# EAGLE board emonTx4-CTExt (EAGLE 9.6.2)
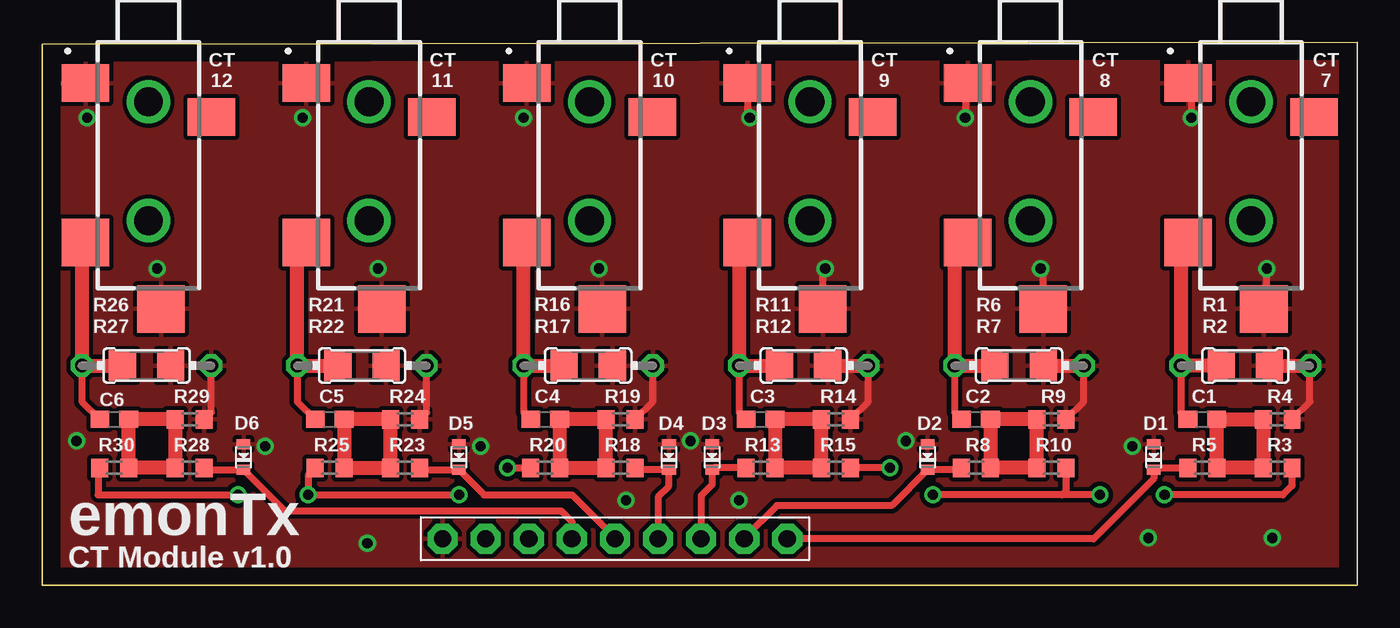
[diagram p0: board, top side]
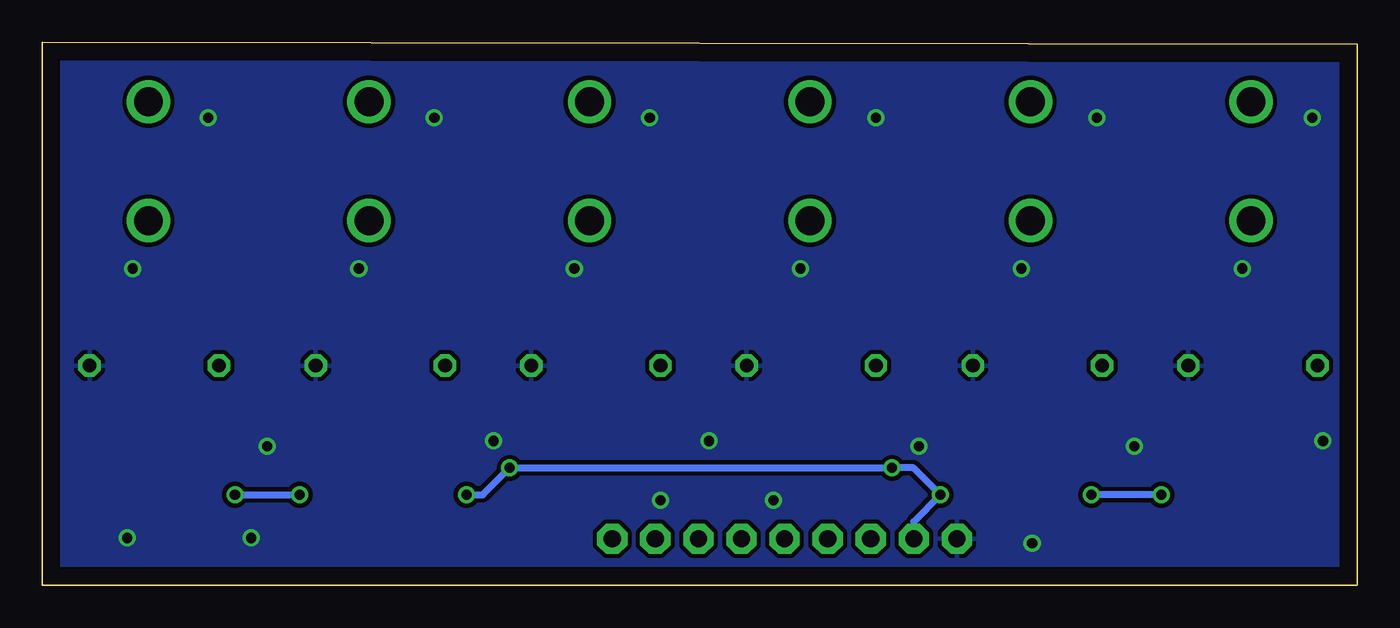
[diagram p1: board, bottom side, seen from below]

Size 77.5 x 32 mm. Coordinates in mm from the lower left corner, seen from the top.
Outline: 0,31.91 0,0 77.5,0 77.5,32 0,31.91
Copper layers (1*16): Top 0.035mm / dielectric 1.5mm / Bottom 0.035mm
Design rules "default *": minimum track width 6mil, minimum drill 0.35mm, track to track 6mil, track to pad 6mil, pad to pad 6mil, via to via 6mil, smd to smd 6mil, copper to edge 40mil, drill to drill 6mil, minimum pad ring 10mil, minimum via ring 8mil, stop-mask expansion 4mil, vias tented up to drill 0.6mm, thermal gap 10mil
Net classes: 0 default: width 0.203 mm, drill 0.6 mm, clearance 0.203 mm; 1 power: width 0.305 mm, drill 0.6 mm, clearance 0.254 mm; 2 gnd: width 0.254 mm, drill 0.6 mm, clearance 0.254 mm

## Footprints (pad centres in the part's own frame; a part is rotated, then mirrored left to right if it is on the bottom)
1X09-BIG = drill 1.016 pad 1.778 octagon: 1 -10.16,0; 2 -7.62,0; 3 -5.08,0; 4 -2.54,0; 5 0,0; 6 2.54,0; 7 5.08,0; 8 7.62,0; 9 10.16,0
C0603 = smd 1.1 x 1: 1 -0.85,0; 2 0.85,0
SOD-523 = smd 0.8 x 0.6: A 0,-0.75; K 0,0.75
SJ-3524-SMT-TR = smd 2.2 x 2.8: 1 2.4,-6.7; 3 4.4,0.7 | smd 2.8 x 2.8: 2 11.8,-6.7; 4 15.7,-2.25 | drill 1.7 pad 2.55: 5 3.5,-3; 6 10.5,-3
R1206 = smd 1.6 x 1.803: 1 -1.422,0; 2 1.422,0
0204/7 = drill 0.813 octagon: 1 -3.81,0; 2 3.81,0
R0603 = smd 1 x 1.1: 1 -0.85,0; 2 0.85,0

## Placement (x,y rotation side)
ANALOG_EXPANDER  [1X09-BIG]  33.75,2.75 0 top
C1  10uF 6V  [C0603]  68.37,9.78 0 top
C2  10uF 6V  [C0603]  55.03,9.78 0 top
C3  10uF 6V  [C0603]  42.34,9.78 0 top
C4  10uF 6V  [C0603]  29.63,9.78 0 top
C5  10uF 6V  [C0603]  16.93,9.78 0 top
C6  10uF 6V  [C0603]  4.24,9.78 0 top
D1  ESD5Z3.3T1G  [SOD-523]  65.51,7.56 180 top
D2  ESD5Z3.3T1G  [SOD-523]  52.18,7.56 180 top
D3  ESD5Z3.3T1G  [SOD-523]  39.48,7.56 180 top
D4  ESD5Z3.3T1G  [SOD-523]  36.94,7.56 180 top
D5  ESD5Z3.3T1G  [SOD-523]  24.55,7.56 180 top
D6  ESD5Z3.3T1G  [SOD-523]  11.86,7.56 180 top
J1  SJ-3524-SMT-TR  [SJ-3524-SMT-TR]  74.25,32 270 top
J2  SJ-3524-SMT-TR  [SJ-3524-SMT-TR]  61.25,32 270 top
J3  SJ-3524-SMT-TR  [SJ-3524-SMT-TR]  9.25,32 270 top
J4  SJ-3524-SMT-TR  [SJ-3524-SMT-TR]  48.25,32 270 top
J7  SJ-3524-SMT-TR  [SJ-3524-SMT-TR]  35.25,32 270 top
J8  SJ-3524-SMT-TR  [SJ-3524-SMT-TR]  22.25,32 270 top
R1  [R1206]  70.91,12.96 180 top
R2  [0204/7]  70.91,12.96 180 top
R3  180k  [R0603]  72.81,6.93 0 top
R4  33k  [R0603]  72.81,9.78 0 top
R5  1k  [R0603]  68.37,6.93 180 top
R6  [0204/7]  57.58,12.96 180 top
R7  [R1206]  57.58,12.96 180 top
R8  1k  [R0603]  55.03,6.93 180 top
R9  33k  [R0603]  59.48,9.78 0 top
R10  180k  [R0603]  59.48,6.93 0 top
R11  [0204/7]  44.88,12.96 180 top
R12  [R1206]  44.88,12.96 180 top
R13  1k  [R0603]  42.34,6.93 180 top
R14  33k  [R0603]  46.78,9.78 0 top
R15  180k  [R0603]  46.78,6.93 0 top
R16  [0204/7]  32.17,12.96 180 top
R17  [R1206]  32.17,12.96 180 top
R18  1k  [R0603]  34.08,6.93 0 top
R19  33k  [R0603]  34.08,9.78 0 top
R20  180k  [R0603]  29.63,6.93 180 top
R21  [0204/7]  18.84,12.96 180 top
R22  [R1206]  18.84,12.96 180 top
R23  1k  [R0603]  21.38,6.93 0 top
R24  33k  [R0603]  21.38,9.78 0 top
R25  180k  [R0603]  16.93,6.93 180 top
R26  [0204/7]  6.14,12.96 180 top
R27  [R1206]  6.14,12.96 180 top
R28  1k  [R0603]  8.68,6.93 0 top
R29  33k  [R0603]  8.68,9.78 0 top
R30  180k  [R0603]  4.24,6.93 180 top

## Library data of the parts
ANALOG_EXPANDER = adafruit
C1-C6 = resistor
D1-D6 = microbuilder
J1-J4 J7 J8 = SJ-3524-SMT-TR; ARROW_PART_NUMBER: SJ-3524-SMT-TR; ARROW_PRICE-STOCK: https://www.arrow.com/en/products/sj-3524-smt-tr/cui-devices?region=nac; DESCRIPTION: Phone Connectors Audio Jacks; HEIGHT: mm; MANUFACTURER_NAME: CUI Inc.; MANUFACTURER_PART_NUMBER: SJ-3524-SMT-TR; MOUSER_PART_NUMBER: 490-SJ-3524-SMT-TR; MOUSER_PRICE-STOCK: https://www.mouser.co.uk/ProductDetail/CUI-Devices/SJ-3524-SMT-TR?qs=WyjlAZoYn50%252B7OcNbxvx%252BA%3D%3D
R1-R30 = rcl

## Nets
3.3V: ANALOG_EXPANDER.2 R3.2 R10.2 R15.2 R20.2 R25.2 R30.2
AGND [gnd]: ANALOG_EXPANDER.1 D1.A D2.A D3.A D4.A D5.A D6.A J1.1 J1.4 J2.1 J2.4 J3.1 J3.4 J4.1 J4.4 J7.1 J7.4 J8.1 J8.4 R1.1 R2.1 R4.2 R6.1 R7.1 R9.2 R11.1 R12.1 R14.2 R16.1 R17.1 R19.2 R21.1 R22.1 R24.2 R26.1 R27.1 R29.2
CT7: ANALOG_EXPANDER.9 D1.K R5.2
CT8: ANALOG_EXPANDER.8 D2.K R8.2
CT9: ANALOG_EXPANDER.7 D3.K R13.2
CT10: ANALOG_EXPANDER.6 D4.K R18.2
CT11: ANALOG_EXPANDER.5 D5.K R23.2
CT12: ANALOG_EXPANDER.4 D6.K R28.2
N$1: C2.1 J2.2 R6.2 R7.2
N$2: C2.2 R8.1 R9.1 R10.1
N$3: C3.1 J4.2 R11.2 R12.2
N$4: C3.2 R13.1 R14.1 R15.1
N$5: C4.1 J7.2 R16.2 R17.2
N$6: C4.2 R18.1 R19.1 R20.1
N$7: C5.1 J8.2 R21.2 R22.2
N$8: C5.2 R23.1 R24.1 R25.1
N$9: C6.1 J3.2 R26.2 R27.2
N$10: C6.2 R28.1 R29.1 R30.1
N$11: C1.2 R3.1 R4.1 R5.1
N$13: C1.1 J1.2 R1.2 R2.2
VREFA: ANALOG_EXPANDER.3

## Tracks (layer width: path | path; a pad name or v marks a point on that pad's centre or on a via)
3.3V  (via drill 0.6)
  Top 0.406: R30.2 3.28,6.83 3.28,5.34 v11.54,5.34 | v24.55,5.34 v15.66,5.34 15.66,6.51 R25.2 | v27.41,6.93 R20.2 | R10.2 60.33,5.55 60.12,5.34 | 60.12,5.34 v52.49,5.34 | v49.95,6.93 R15.2 | R3.2 73.67,5.87 73.13,5.34 v66.15,5.34 | v62.34,5.34 60.12,5.34
  Bottom 0.406: v11.54,5.34 v15.66,5.34 | ANALOG_EXPANDER.2 26.13,3.77 v24.55,5.34 26.14,6.93 v27.41,6.93 v49.95,6.93 51.54,5.34 v52.49,5.34 | v66.15,5.34 v62.34,5.34
AGND  (via drill 0.6)
  Top 0.406: R14.2 48.69,10.84 R11.1 | R9.2 61.39,10.84 R6.1 | R4.2 74.72,10.84 R2.1 | J4.4 46,18.53 v46.15,18.67 | J2.4 59,18.52 v58.84,18.67 | J1.4 72.18,16.48 v72.18,18.67 | J4.1 41.55,27.72 v41.7,27.56 | J2.1 54.4,29.45 v54.4,27.56 | J1.1 67.73,29.42 v67.73,27.56 | R29.2 9.95,10.2 R26.1 | R24.2 22.65,10.2 R21.1 | R19.2 35.98,10.84 R16.1
  Top 0.813: R12.1 R11.1 | R7.1 R6.1 | R1.1 R2.1
  other vias: 28.36,27.56 32.81,18.67 15.35,27.56 19.79,18.67 6.78,18.67 2.65,27.56 13.12,8.2 25.82,8.2 38.21,8.52 50.91,8.52 64.24,8.2 2.01,8.52 65.19,2.8 72.5,2.8 19.16,2.48 34.4,5.02 41.06,5.02
  pour Top: -2.75,34 80.25,34 80.25,-2 -2.75,-2
  pour Bottom: -1.75,32.5 79.25,32.5 79.25,-1 -1.75,-1
CT7
  Top 0.406: R5.2 65.63,6.93 D1.K 65.51,6.29 61.97,2.75 ANALOG_EXPANDER.9
CT8
  Top 0.406: R8.2 54.07,6.81 D2.K 50.07,4.7 43.29,4.7 41.37,2.79 ANALOG_EXPANDER.8
CT9
  Top 0.406: R13.2 39.59,6.93 D3.K 39.48,5.94 38.83,5.29 ANALOG_EXPANDER.7
CT10
  Top 0.406: ANALOG_EXPANDER.6 36.29,3.38 36.3,3.4 36.3,5.23 36.94,5.86 D4.K 35.05,6.81 R18.2
CT11
  Top 0.406: R23.2 22.34,6.81 D5.K 26.03,5.34 31.22,5.34 33.75,2.81 ANALOG_EXPANDER.5
CT12
  Top 0.406: R28.2 9.64,6.81 D6.K 14.28,4.39 30.59,4.39 31.21,3.77 ANALOG_EXPANDER.4
N$1
  Top 0.406: R6.2 53.77,10.2 C2.1
  Top 0.813: J2.2 53.77,19.42 R6.2 R7.2
N$2
  Top 0.813: C2.2 R8.1 R10.1 R9.1 C2.2
N$3
  Top 0.406: R11.2 41.06,10.2 C3.1
  Top 0.813: J4.2 41.06,19.72 R11.2 R12.2
N$4
  Top 0.813: C3.2 R13.1 R15.1 R14.1 C3.2
N$5
  Top 0.406: R16.2 28.36,10.2 C4.1
  Top 0.813: J7.2 28.36,20.02 R16.2 R17.2
N$6
  Top 0.813: R19.1 C4.2 R20.1 R18.1 R19.1
N$7
  Top 0.406: R21.2 15.03,10.84 C5.1
  Top 0.813: J8.2 15.03,19.68 R21.2 R22.2
N$8
  Top 0.813: R24.1 C5.2 R25.1 R23.1 R24.1
N$9
  Top 0.406: R26.2 2.33,10.84 C6.1
  Top 0.813: J3.2 2.33,19.98 R26.2 R27.2
N$10
  Top 0.813: R29.1 C6.2 R30.1 R28.1 R29.1
N$11
  Top 0.813: C1.2 R4.1 R3.1 R5.1 C1.2
N$13
  Top 0.406: R2.2 67.1,10.2 C1.1
  Top 0.813: R1.2 R2.2 67.1,19.75 J1.2
(copper drawn outside any net)
  shapes: Top area x1

## Text on the board
tPlace: CT / 12 | CT / 11 | CT / 10 | CT / 9 | CT / 8 | CT / 7 | emonTx | CT Module v1.0
_tsilk: Designed in | North Wales | Made in UK
_bsilk: SMT V0.6 rev3 | emonTx | wireless energy monitoring node | SMT V0.6 rev3 | emonTx | SMT V0.6 rev3 | emonTx | Technology that helps us live within ecological limits | wireless energy monitoring node | wireless energy monitoring node | Designed in North Wales UK by Glyn Hudson & Trystan Lea | Technology that helps us live within ecological limits | Technology that helps us live within ecological limits | Designed in North Wales UK by Glyn Hudson & Trystan Lea | 165mm ant | 433Mhz | Designed in North Wales UK by Glyn Hudson & Trystan Lea | 165mm ant | 165mm ant | 433Mhz | 433Mhz | 868Mhz | 82mm ant | 82mm ant | 82mm ant | 868Mhz | 868Mhz | 78mm ant | 915Mhz | 78mm ant | 915Mhz | 78mm ant | 915Mhz | 165mm ant | 433Mhz | 82mm ant | 868Mhz | 78mm ant | 915Mhz